# Altium PCB ESC_altimeter_v01.PcbDoc
Units mm, origin at the board's own origin, x right, y up, seen from the top; angles counter-clockwise.
Board outline 152.4 x 101.6 mm, 2 copper layers (Top Layer, Bottom Layer); 3 components, 0 nets, 62 pads, 0 vias.
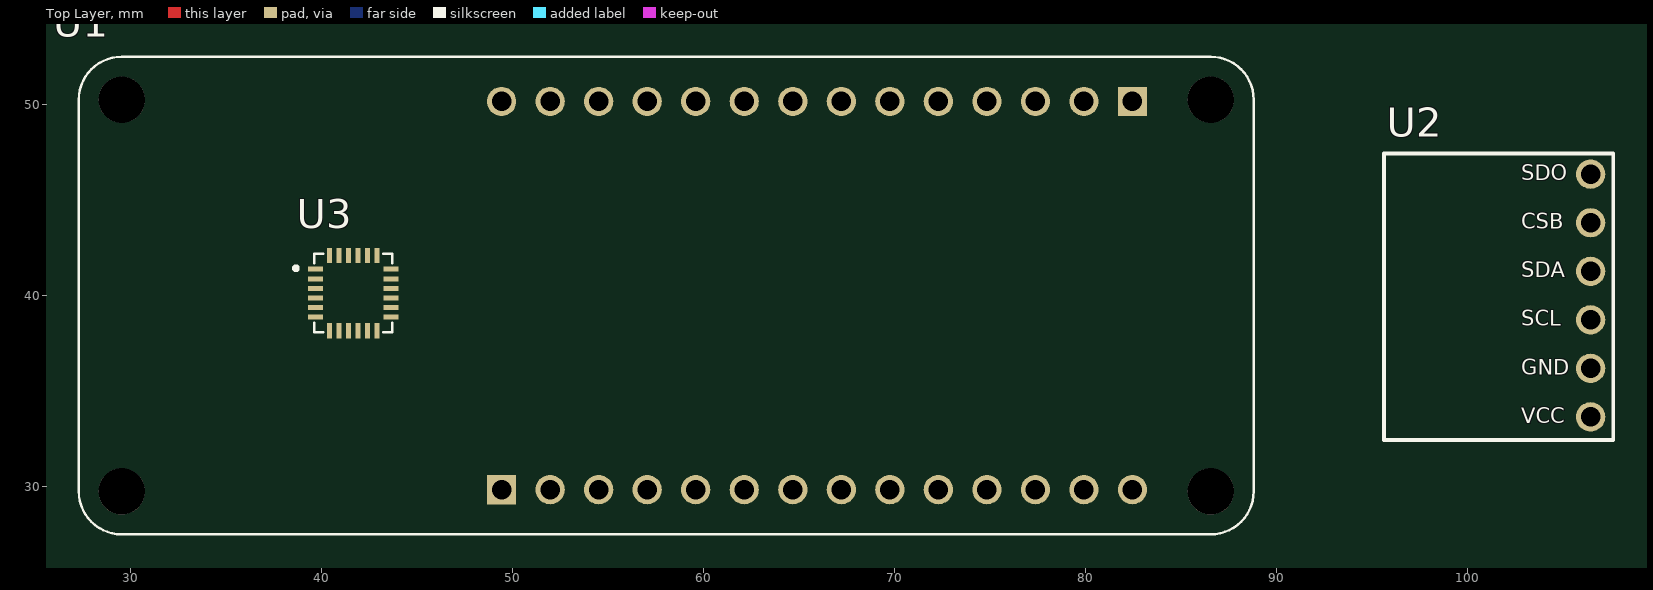
[diagram p0: Top Layer view]
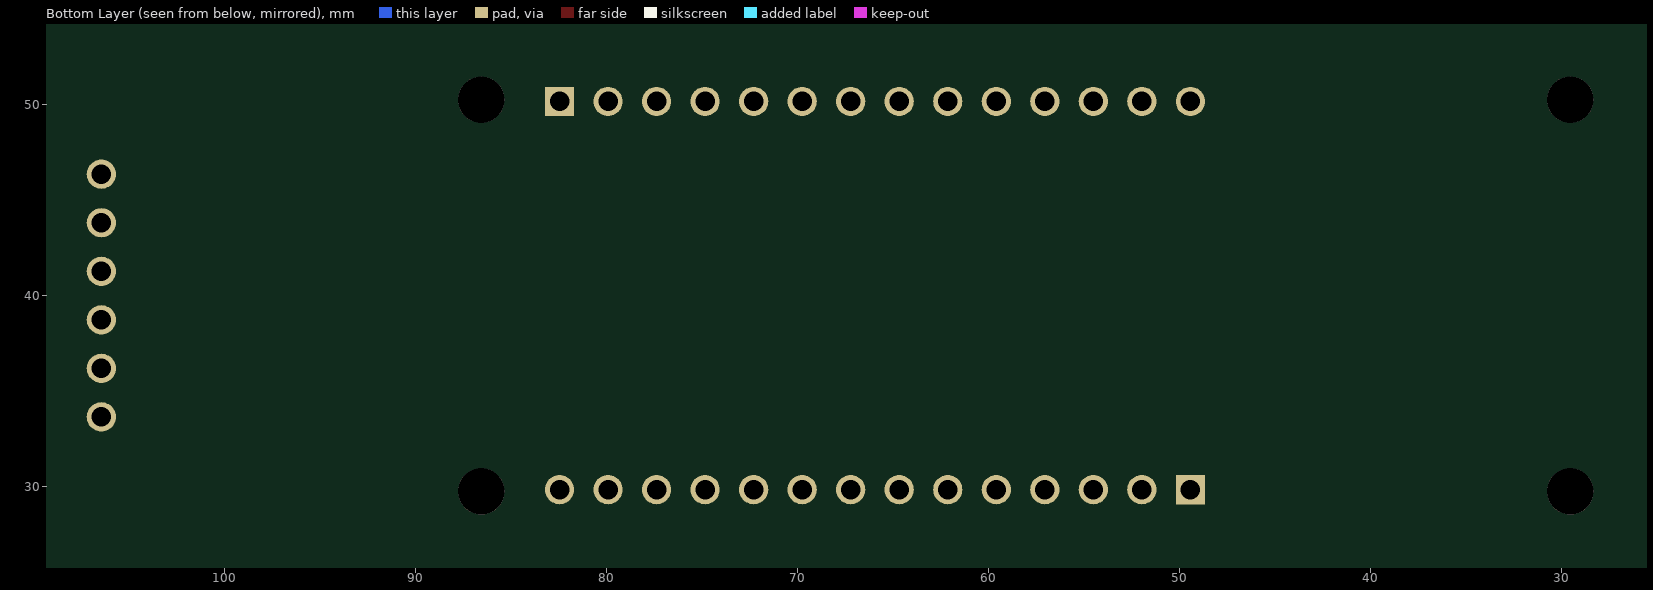
[diagram p1: Bottom Layer view, seen from below]

## Layer stack, top to bottom
Top Solder: solder mask 0.0102, Solder Resist, Dk 3.5
Top Layer: signal copper 0.0356
Dielectric 1: dielectric 0.32, FR-4, Dk 4.8
Bottom Layer: signal copper 0.0356
Bottom Solder: solder mask 0.0102, Solder Resist, Dk 3.5

## Board outline
25.4,25.4 177.8,25.4 177.8,127 25.4,127

## Design rules (kind name [scope] priority, off if disabled: settings)
Clearance [All] p1: gap=0.254 ignorepadtopadclearanceinfootprint=FALSE except(0: Arc-Hole Track-Hole SMDPad-Hole THPad-Hole Via-Hole Fill-Hole Poly-Hole Region-Hole Text-Hole)
PolygonConnect [All] p1: connectstyle=Relief reliefconductorwidth=0.254 reliefentries=4 polygonreliefangle="90 Angle" airgapwidth=0.254
RoutingVias [All] p1: holewidth=0.711 width=1.27 viastyle="Through Hole" minholewidth=0.711 minwidth=1.27 maxholewidth=0.711 maxwidth=1.27
SolderMaskExpansion [All] p1: expansion=0.102 istentingtop=FALSE
Width [All] p1: maxlimit=0.254 minlimit=0.254 preferedwidth=0.254
30 further rules are at their usual default settings.

## Components (designator, comment, footprint, x,y, rotation, side; value= is the part's Value field where it differs from the comment)
U1 "ARDUINO_MKR_ZERO" MODULE_ARDUINO_MKR_ZERO 58.039,40.005 r0 top
U2 "BMP280" BMP280 107.611,32.442 r90 top
U3 "MPU-6050" QFN50P400X400X95-24N 41.656,40.132 r0 top

## Footprints (in the part's own frame and the unit in brackets; to place one, negate y for a bottom-side part, rotate by r counter-clockwise, add the part's x,y. Pads: shape width x height; smd on the part's side, far side on the other; paste and mask are expansions set on the pad)
BMP280 [mm]
  round 1.53 hole 1.02: 1(1.213,1.185) 2(3.753,1.185) 3(6.293,1.185) 4(8.833,1.185) 5(11.373,1.185) 6(13.913,1.185)
  silkscreen extent 0,0 15,12
MODULE_ARDUINO_MKR_ZERO [mm]
  rect 1.53x1.53 hole 1.02: J4_1(-8.615,-10.16) J5_1(24.405,10.16)
  round 1.53 hole 1.02: J4_2(-6.075,-10.16) J4_3(-3.535,-10.16) J4_4(-0.995,-10.16) J4_5(1.545,-10.16) J4_6(4.085,-10.16) J4_7(6.625,-10.16) J4_8(9.165,-10.16) J4_9(11.705,-10.16) J4_10(14.245,-10.16) J4_11(16.785,-10.16) J4_12(19.325,-10.16) J4_13(21.865,-10.16) J4_14(24.405,-10.16) J5_2(21.865,10.16) J5_3(19.325,10.16) J5_4(16.785,10.16) J5_5(14.245,10.16) J5_6(11.705,10.16) J5_7(9.165,10.16) J5_8(6.625,10.16) J5_9(4.085,10.16) J5_10(1.545,10.16) J5_11(-0.995,10.16) J5_12(-3.535,10.16) J5_13(-6.075,10.16) J5_14(-8.615,10.16)
  round 2.42 hole 2.42 unplated: ""(-28.5,-10.25) ""(-28.5,10.25) ""(28.5,-10.25) ""(28.5,10.25)
  silkscreen extent -30.75,-12.5 30.75,12.5
QFN50P400X400X95-24N [mm]
  rect 0.79x0.26 smd: 1(-1.97,1.25) 2(-1.97,0.75) 3(-1.97,0.25) 4(-1.97,-0.25) 5(-1.97,-0.75) 6(-1.97,-1.25) 13(1.97,-1.25) 14(1.97,-0.75) 15(1.97,-0.25) 16(1.97,0.25) 17(1.97,0.75) 18(1.97,1.25)
  rect 0.26x0.79 smd: 7(-1.25,-1.97) 8(-0.75,-1.97) 9(-0.25,-1.97) 10(0.25,-1.97) 11(0.75,-1.97) 12(1.25,-1.97) 19(1.25,1.97) 20(0.75,1.97) 21(0.25,1.97) 22(-0.25,1.97) 23(-0.75,1.97) 24(-1.25,1.97)
  silkscreen extent -3.1,-2.05 2.05,2.05, body extent -2,-2 2,2, height 0.93

## Part data
U1: "ATSAMD21 Arduino MKR Zero with Headers SAM D ARMÂ® CortexÂ®-M0+ MCU 32-Bit Embedded Evaluation Board", Package=None, Availability=Unavailable, Check_prices=https://www.snapeda.com/parts/ARDUINO%20MKR%20ZERO/Arduino/view-part/2709581/?ref=eda, MF=Arduino, MP="ARDUINO MKR ZERO", Price=None, SnapEDA_Link=https://www.snapeda.com/parts/ARDUINO%20MKR%20ZERO/Arduino/view-part/2709581/?ref=snap
U3: "MPU-6050 Six-Axis (Gyro + Accelerometer) MEMS MotionTrackingâ„¢ Devices", Package=None, Availability=Unavailable, MF="{'manufacturer': u'TDK InvenSense'}", MP=MPU-6050, Price=None

## Nets (pads, with @x,y where several pads share a name; then routed paths per layer and width w, separated by ;. In a path a pad name is that pad's centre, name@x,y a point inside that pad or via, vN(x,y) a via of type N, cw(c..) or ccw(c..) an arc to the next point about the centre after c; other vN are vias at no path point)
pads on no net: U1. U1.J4_1 U1.J4_2 U1.J4_3 U1.J4_4 U1.J4_5 U1.J4_6 U1.J4_7 U1.J4_8 U1.J4_9 U1.J4_10 U1.J4_11 U1.J4_12 U1.J4_13 U1.J4_14 U1.J5_1 U1.J5_2 U1.J5_3 U1.J5_4 U1.J5_5 U1.J5_6 U1.J5_7 U1.J5_8 U1.J5_9 U1.J5_10 U1.J5_11 U1.J5_12 U1.J5_13 U1.J5_14 U2.1 U2.2 U2.3 U2.4 U2.5 U2.6 U3.1 U3.2 U3.3 U3.4 U3.5 U3.6 U3.7 U3.8 U3.9 U3.10 U3.11 U3.12 U3.13 U3.14 U3.15 U3.16 U3.17 U3.18 U3.19 U3.20 U3.21 U3.22 U3.23 U3.24

## Text inside footprints (layer, text, board x,y; h text height)
U2: Top Overlay "SDO" at 102.785,46.031 h0.8; Top Overlay "CSB" at 102.785,43.491 h0.8; Top Overlay "SDA" at 102.785,40.951 h0.8; Top Overlay "SCL" at 102.785,38.411 h0.8; Top Overlay "VCC" at 102.785,33.331 h0.8; Top Overlay "GND" at 102.785,35.871 h0.8